# Altium PCB middlePCB_rev4.PcbDoc
Units mm, origin at the board's own origin, x right, y up, seen from the top; angles counter-clockwise.
Board outline 100.07 x 100 mm, 2 copper layers (Top Layer, Bottom Layer); 66 components, 66 nets, 280 pads, 196 vias.
Unrouted connection lines stored in the file: 215.
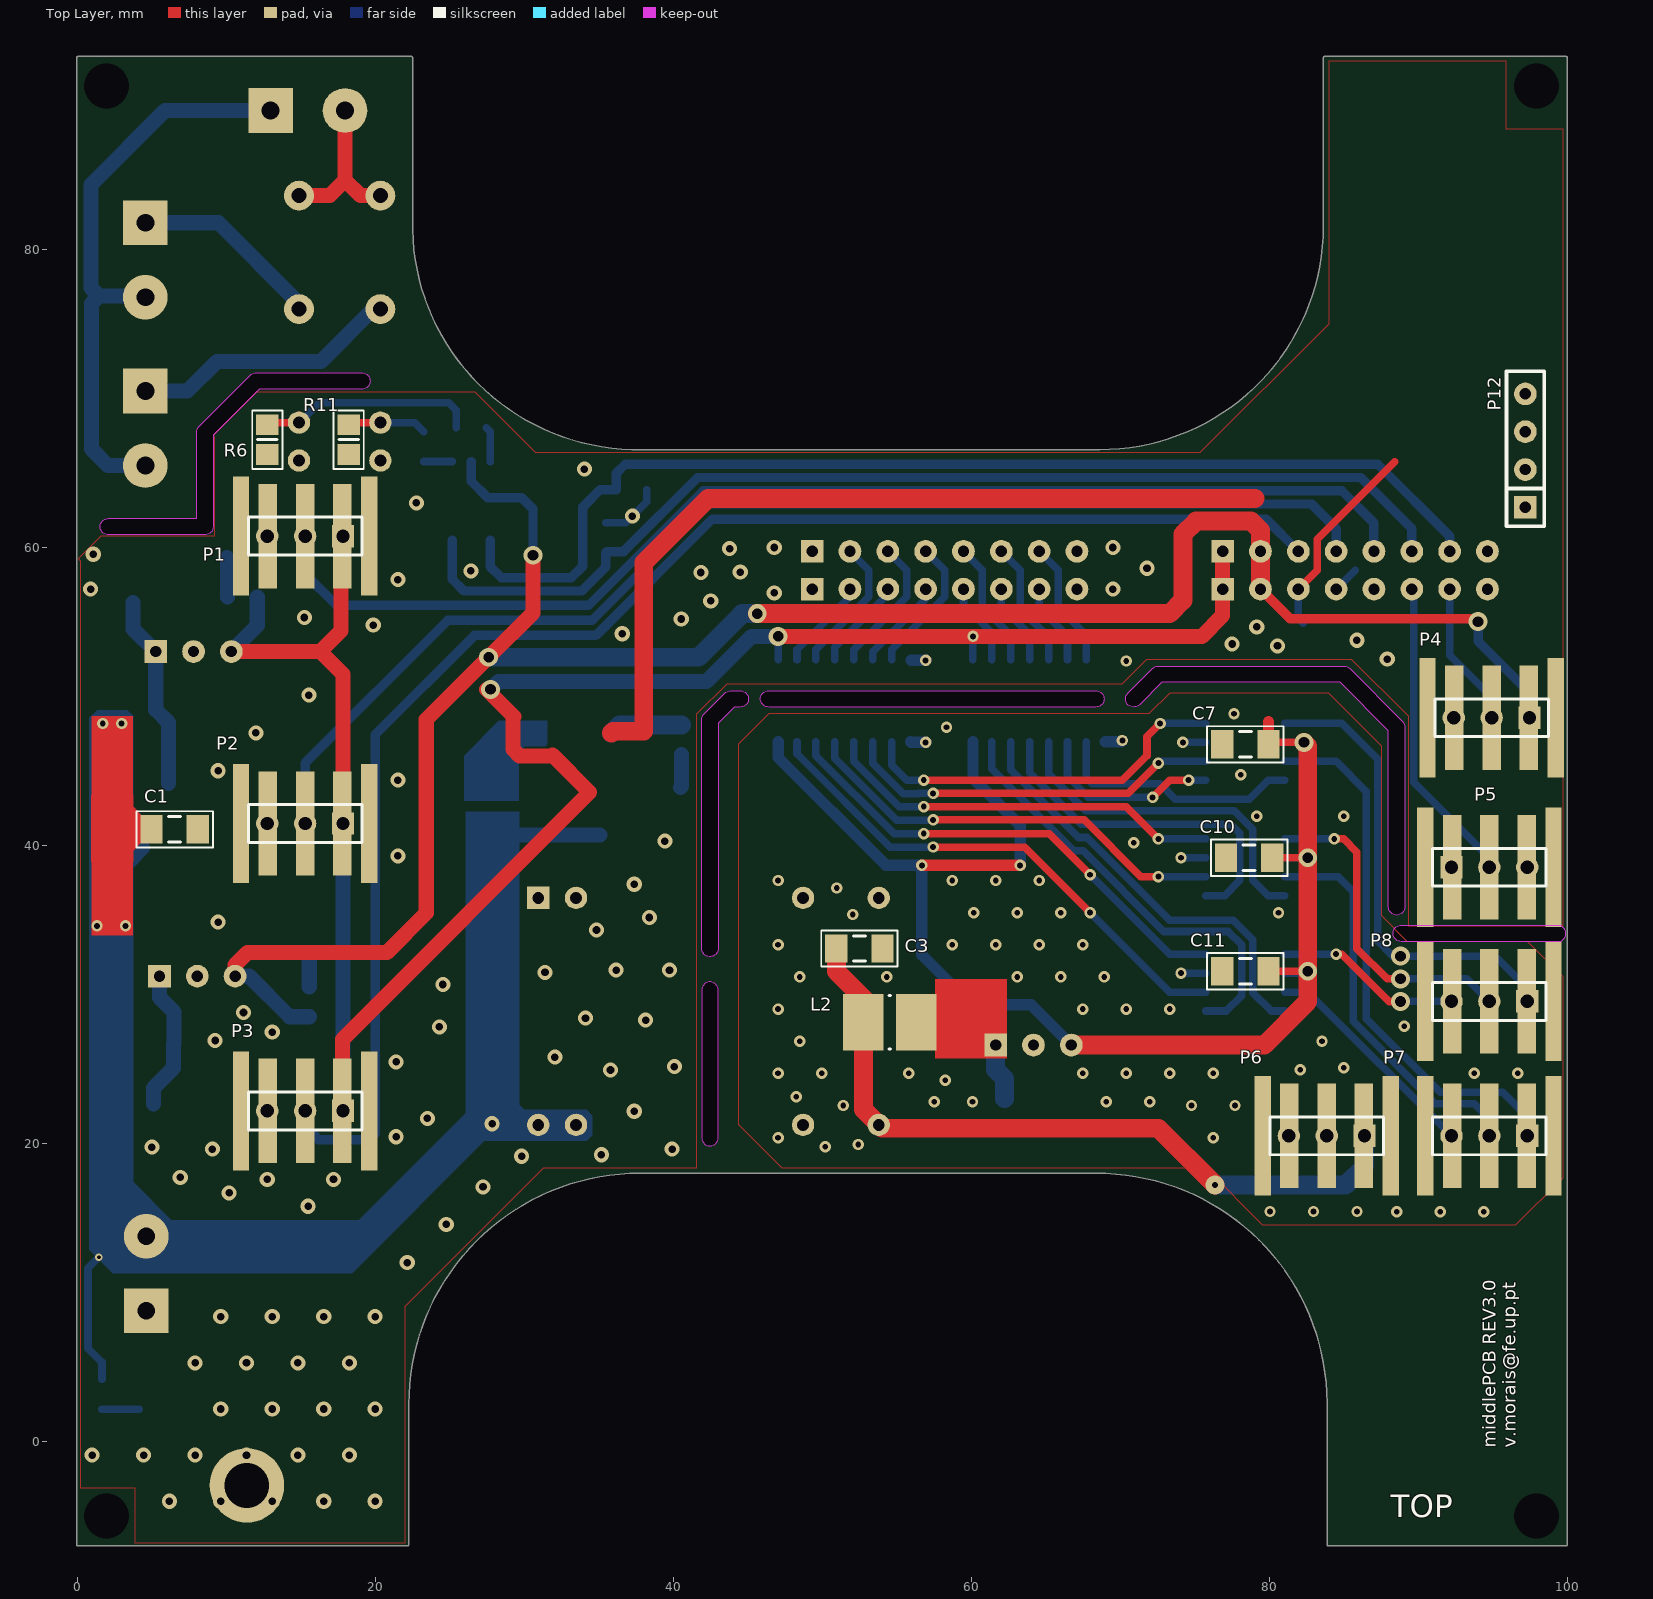
[diagram p0: Top Layer view]
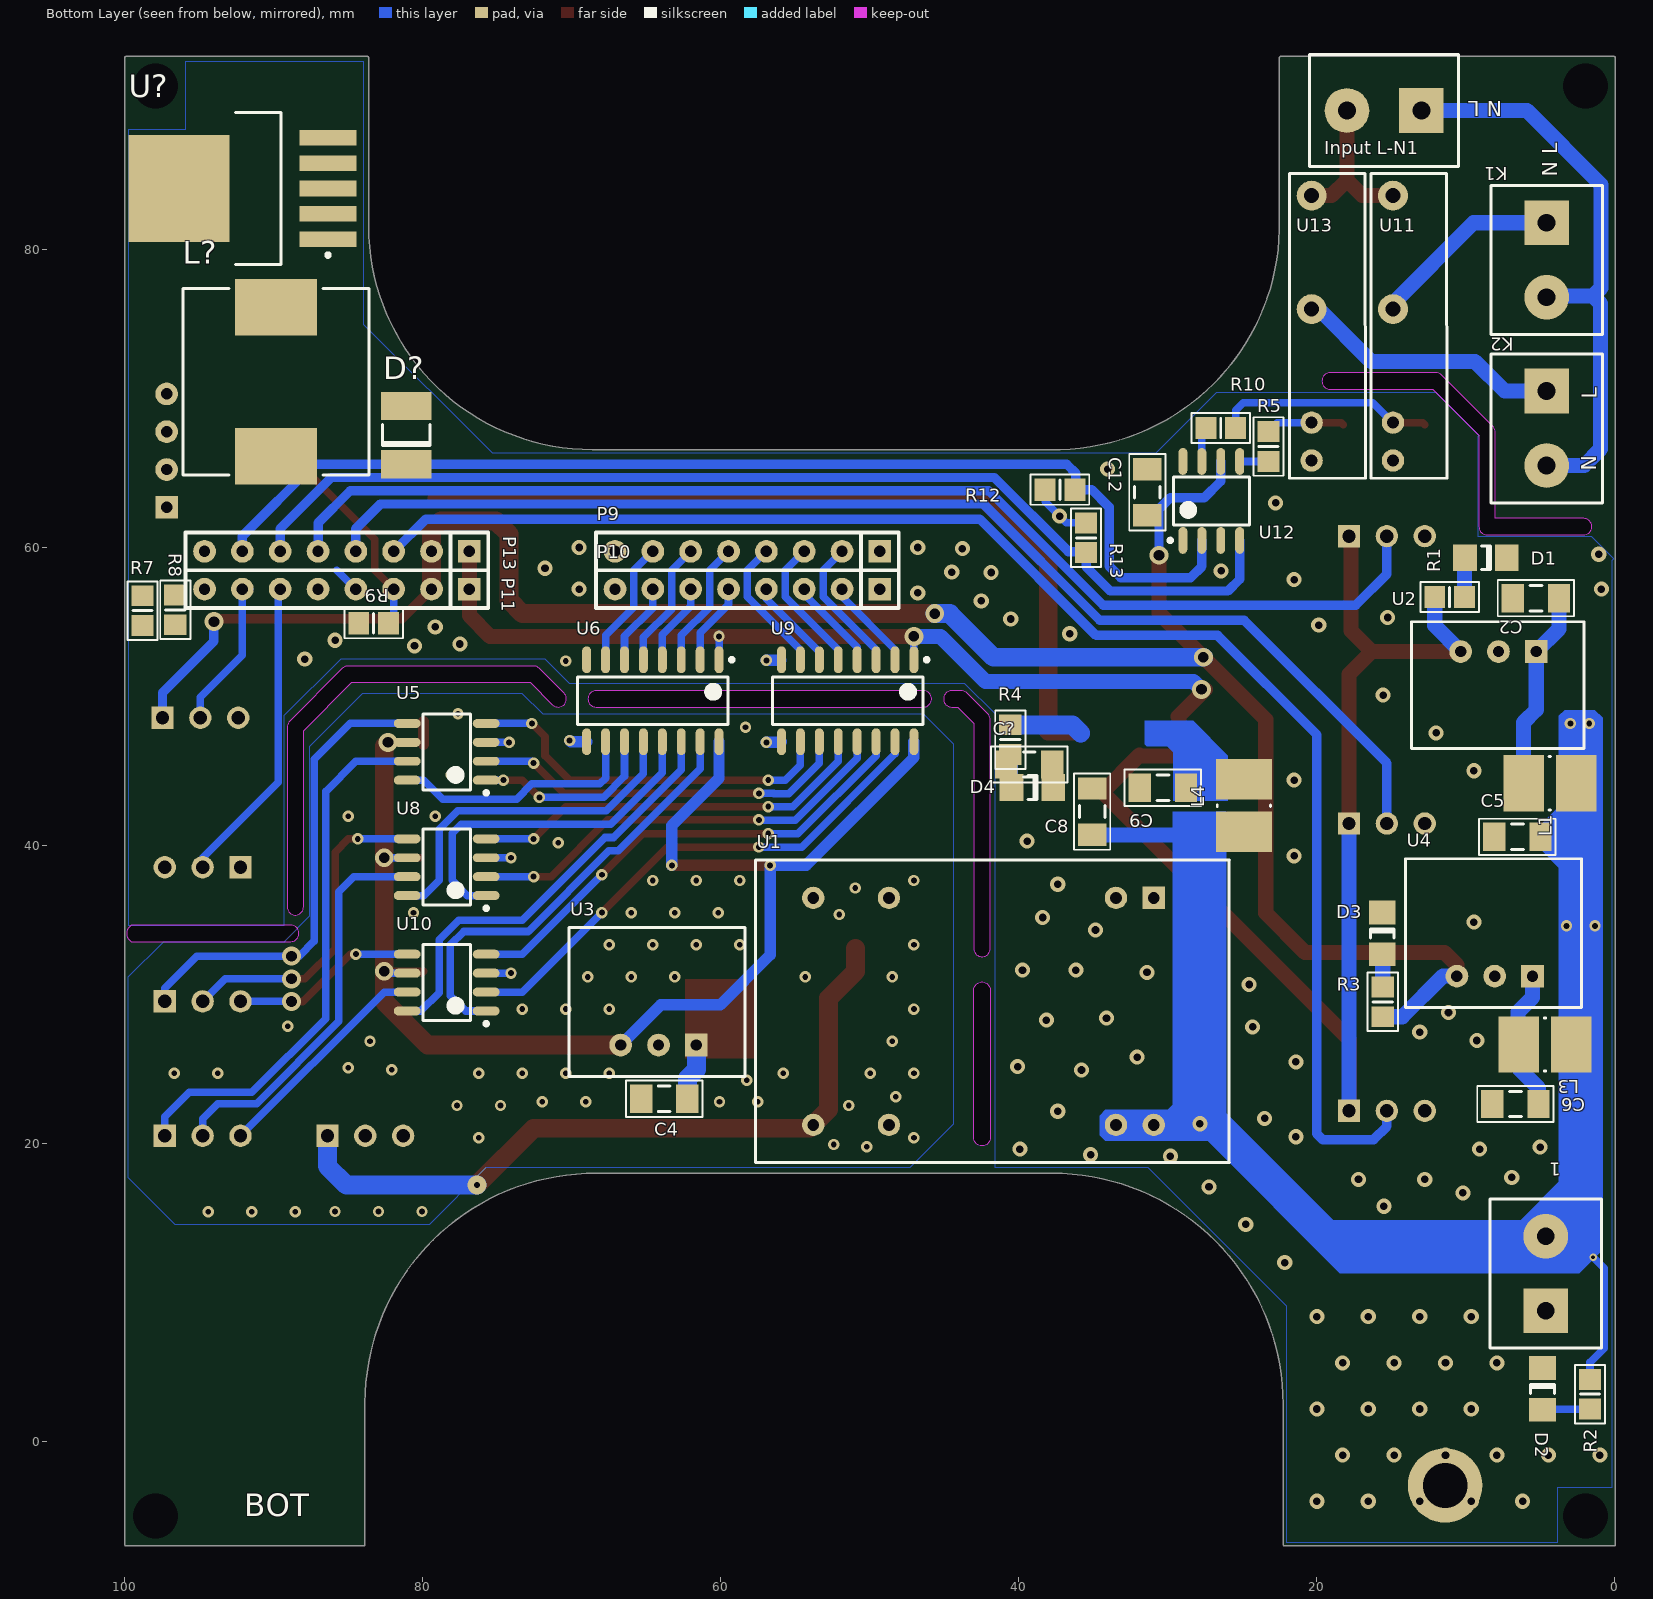
[diagram p1: Bottom Layer view, seen from below]
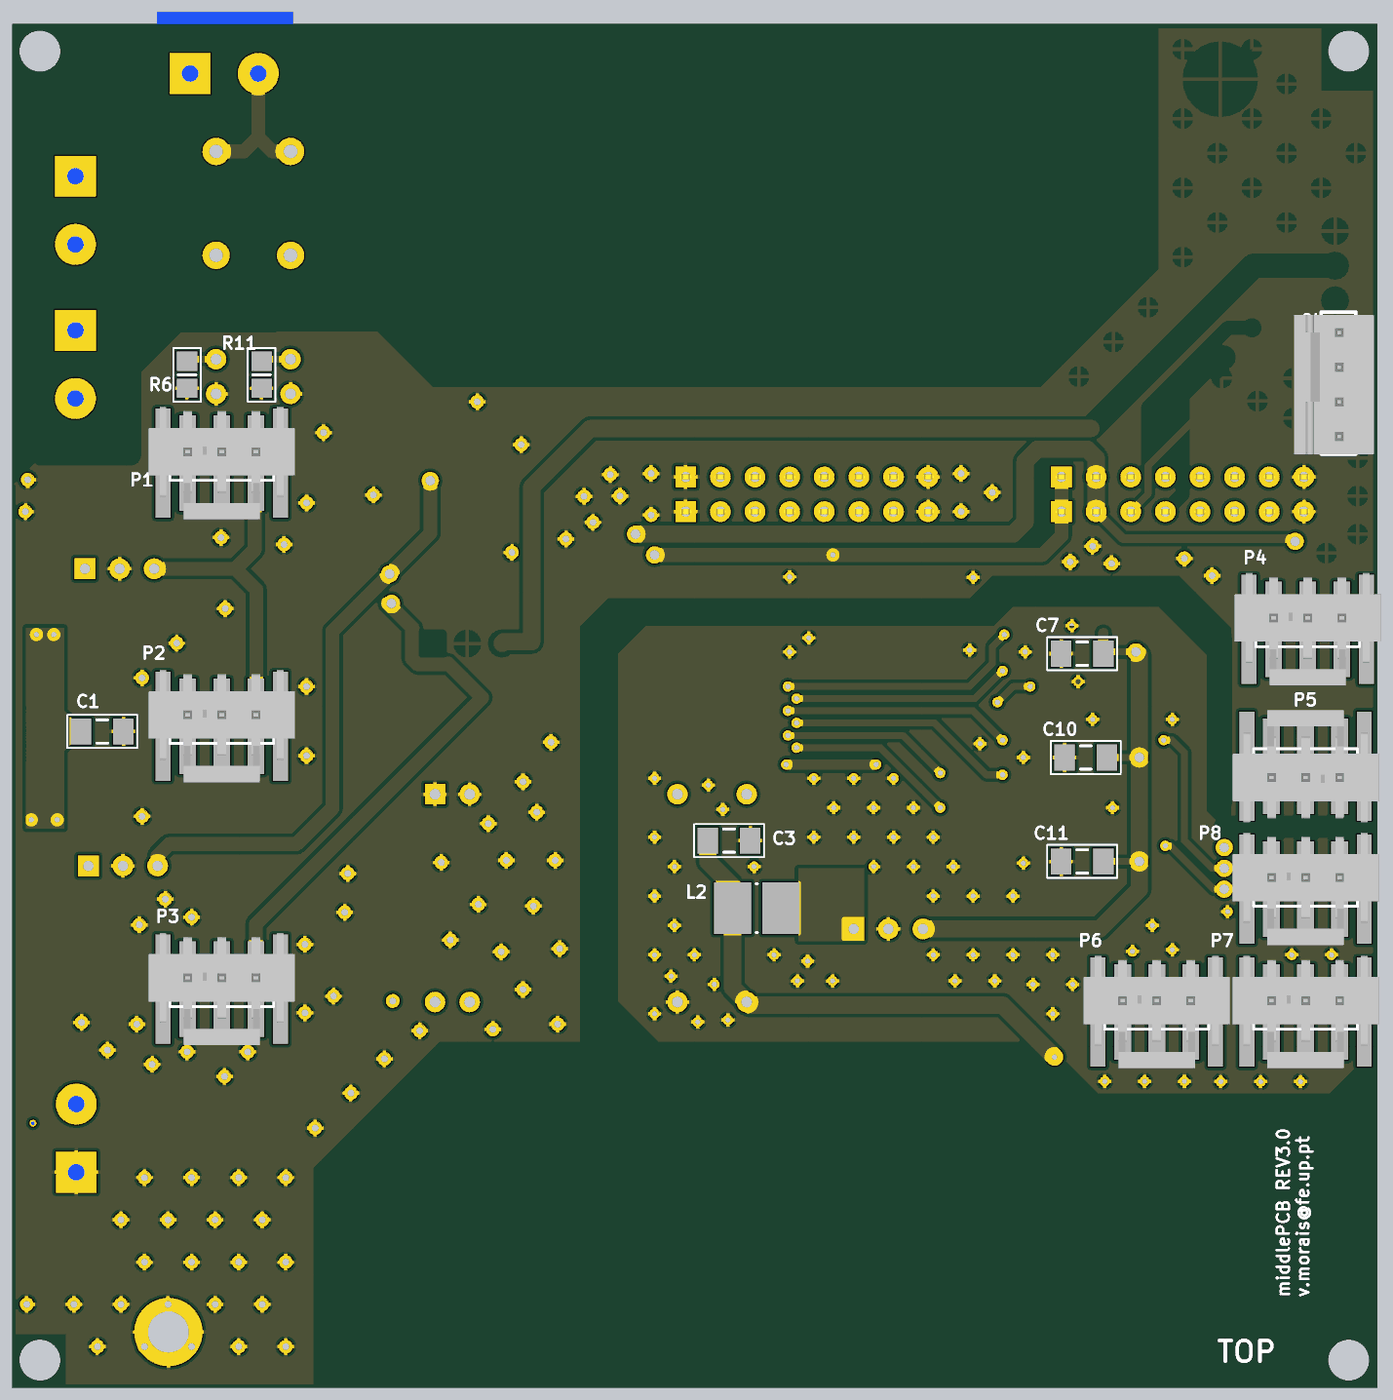
[diagram p2: 3D render of the assembled board from above, using the file's embedded part models]

## Layer stack, top to bottom
Top Solder: solder mask 0.0102, Solder Resist, Dk 3.5
Top Layer: signal copper 0.0356
Dielectric 1: dielectric 0.32, FR-4, Dk 4.8
Bottom Layer: signal copper 0.0356
Bottom Solder: solder mask 0.0102, Solder Resist, Dk 3.5

## Board outline
0.025,-7.009 22.123,-7.009 ccw(c22.123,-6.909) 22.224,-6.909 22.224,2.489 cw(c37.744,2.489) 37.744,18.01 68.351,18.01 ccw(c68.351,18.11) 68.352,18.01 cw(c68.415,2.553) 83.872,2.616 83.872,-6.909 ccw(c83.972,-6.909) 83.972,-7.009 99.898,-7.009 ccw(c99.898,-6.909) 99.999,-6.909 99.999,92.888 ccw(c99.898,92.888) 99.898,92.988 83.718,92.988 ccw(c83.718,92.888) 83.618,92.888 83.618,81.547 cw(c68.637,81.578) 68.606,66.598 ccw(c68.605,66.497) 68.605,66.598 37.871,66.598 ccw(c37.871,66.497) 37.869,66.598 cw(c37.554,81.674) 22.478,81.357 cw(c37.554,81.674) 22.478,81.358 22.478,81.356 22.478,92.888 ccw(c22.377,92.888) 22.377,92.988 0.025,92.988 ccw(c0.025,92.888) -0.074,92.875 ccw(c0.025,92.862) -0.075,92.862 -0.075,-6.909 ccw(c0.025,-6.909)
cut-out: 71.281,49.471 cw(c70.891,49.86) 70.502,50.249 72.153,51.9 cw(c72.542,51.513) 72.542,52.062 84.988,52.062 cw(c84.988,51.511) 85.379,51.899 88.934,48.344 cw(c88.546,47.956) 89.095,47.955 89.095,35.89 cw(c88.544,35.89) 87.994,35.89 87.994,47.727 84.76,50.961 72.77,50.961
cut-out: 46.38,49.31 cw(c46.38,49.86) 46.38,50.411 68.351,50.411 cw(c68.351,49.86) 68.902,49.86 cw(c68.351,49.86) 68.351,49.31
cut-out: 41.893,20.396 ccw(c42.443,20.396) 42.994,20.396 42.994,30.302 ccw(c42.443,30.302) 41.893,30.302
cut-out: 88.856,33.562 cw(c88.856,34.112) 88.856,34.663 99.543,34.663 cw(c99.248,34.112) 99.543,33.562
cut-out: 2.057,60.867 cw(c2.057,61.417) 2.057,61.968 7.984,61.968 7.984,67.767 cw(c8.534,67.767) 8.146,68.157 11.574,71.585 cw(c11.963,71.198) 11.963,71.747 19.075,71.747 cw(c19.075,71.196) 19.626,71.196 cw(c19.075,71.196) 19.075,70.646 12.191,70.646 9.085,67.539 9.085,61.417 cw(c8.534,61.417) 8.534,60.867
cut-out: 41.893,33.096 41.893,48.463 cw(c42.443,48.463) 42.055,48.853 42.054,48.852 43.451,50.249 43.45,50.248 cw(c43.84,49.86) 43.84,50.411 44.475,50.411 cw(c44.475,49.86) 45.026,49.86 cw(c44.475,49.86) 44.475,49.31 44.068,49.31 42.994,48.235 42.994,33.096 cw(c42.443,33.096)

## Design rules (kind name [scope] priority, off if disabled: settings)
Clearance [All] p1: gap=0.254 ignorepadtopadclearanceinfootprint=FALSE
Height [All] p1: minheight=0 maxheight=254 prefheight=12.7
HoleSize [All] p1: absolutevalues=TRUE maxlimit=25.4 minlimit=0.2 maxpercent=80.000 minpercent=20.000
PlaneClearance [All] p1: clearance=2.54
PolygonConnect [All] p1: connectstyle=Relief reliefconductorwidth=0.254 reliefentries=4 polygonreliefangle="90 Angle" airgapwidth=0.254
RoutingVias [All] p1: holewidth=0.711 width=1.27 viastyle="Through Hole" minholewidth=0.711 minwidth=1.27 maxholewidth=0.711 maxwidth=1.27
SilkToSilkClearance [All] p1: silktosilkclearance=0.025
SilkToSolderMaskClearance [IsPad] p1: minsilkscreentomaskgap=0.025 clearancetoexposedcopper=TRUE
SolderMaskExpansion [All] p1: expansion=0.102
Width [All] p1: maxlimit=3.81 minlimit=0.127 preferedwidth=0.508
25 further rules are at their usual default settings.

## Components (designator, comment, footprint, x,y, rotation, side; value= is the part's Value field where it differs from the comment)
1 "P 2p 5mm" connector1x2_parafuso 4.597,11.278 r90 bottom
C1 "C 10uF 1206 MLCC 50V X5R" CAPC_1206 6.502,41.097 r180 top
C2 "C 10uF 1206 MLCC 50V X5R" CAPC_1206 5.258,56.617 r180 bottom
C3 "C 10uF 1206 MLCC 50V X5R" CAPC_1206 52.476,33.096 r180 top
C4 "C 10uF 1206 MLCC 50V X5R" CAPC_1206 63.779,23.012 r180 bottom
C5 "C 10uF 1206 MLCC 50V X5R" CAPC_1206 6.502,40.597 r180 bottom
C6 "C 10uF 1206 MLCC 50V X5R" CAPC_1206 6.629,22.657 r180 bottom
C7 "C 10uF 1206 MLCC 50V X5R" CAPC_1206 78.384,46.804 r0 top
C8 "C 10uF 1206 MLCC 50V X5R" CAPC_1206 35.052,42.291 r270 bottom
C9 "C 10uF 1206 MLCC 50V X5R" CAPC_1206 30.302,43.891 r180 bottom
C10 "C 10uF 1206 MLCC 50V X5R" CAPC_1206 78.638,39.192 r0 top
C11 "C 10uF 1206 MLCC 50V X5R" CAPC_1206 78.384,31.572 r0 top
C12 "C 10uF 1206 MLCC 50V X5R" CAPC_1206 31.344,63.729 r270 bottom
C? "C 10uF 1206 MLCC 50V X5R" CAPC_1206 39.274,45.449 r180 bottom
D1 "IC LED 1206" DIODE_1206 8.614,59.334 r180 bottom
D2 "IC LED 1206" DIODE_1206 4.826,3.531 r90 bottom
D3 "IC LED 1206" DIODE_1206 15.57,34.112 r90 bottom
D4 "IC LED 1206" DIODE_1206 39.065,43.917 r180 bottom
D? "Diode" DIODE_1812 81.102,67.564 r270 bottom
"Input L-N1" "P 2p 5mm" connector1x2_parafuso 15.446,89.357 r0 bottom
K1 "P 2p 5mm" connector1x2_parafuso 4.538,79.324 r270 bottom
K2 "P 2p 5mm" connector1x2_parafuso 4.538,68.021 r270 bottom
L1 "IND RLS-126" "Inductor - RLS-126" 4.318,44.196 r0 bottom
L2 "IND RLS-126" "Inductor - RLS-126" 54.508,28.143 r0 top
L3 "IND RLS-126" "Inductor - RLS-126" 4.648,26.645 r0 bottom
L4 "IND RLS-126" "Inductor - RLS-126" 24.867,42.697 r90 bottom
L? "IND 100uH 1.7A" IND_SWRB1207 89.84,71.145 r270 bottom
P1 "P 8p 2.54 SR DW 3P" MOLEX_3p_105431_1103 15.265,60.782 r180 top locked
P2 "P 8p 2.54 SR DW 3P" MOLEX_3p_105431_1103 15.265,41.491 r180 top locked
P3 "P 8p 2.54 SR DW 3P" MOLEX_3p_105431_1103 15.265,22.2 r180 top locked
P4 "P 8p 2.54 SR DW 3P" MOLEX_3p_105431_1103 94.92,48.59 r180 top locked
P5 "P 8p 2.54 SR DW 3P" MOLEX_3p_105431_1103 94.767,38.557 r0 top locked
P6 "P 8p 2.54 SR DW 3P" MOLEX_3p_105431_1103 83.845,20.523 r180 top locked
P7 "P 8p 2.54 SR DW 3P" MOLEX_3p_105431_1103 94.767,20.523 r180 top locked
P8 "P 8p 2.54 SR DW 3P" MOLEX_3p_105431_1103 94.767,29.551 r180 top locked
P9 "P 8p 2.54 SR DW 8P" "Header 8x1 8.5mm" 49.301,59.766 r0 bottom
P10 "P 8p 2.54 SR DW 8P" "Header 8x1 8.5mm" 49.301,57.226 r0 bottom
P11 "P 8p 2.54 SR DW 8P" "Header 8x1 8.5mm" 76.86,57.226 r0 bottom
P12 "P 4p 2.54 MOL FAN" "HEADER 4p molex" 97.18,62.713 r90 top
P13 "P 8p 2.54 SR DW 8P" "Header 8x1 8.5mm" 76.86,59.766 r0 bottom
R1 "R 150 1/8W 0805 1%" RESC_0805 11.049,56.693 r0 bottom
R2 "R 2k7 1/8 0805 1%" RESC_0805 1.626,3.175 r90 bottom
R3 "R 330 1/8 0805 1%" RESC_0805 15.545,29.515 r270 bottom
R4 "R 1k2 1/8 0805 1%" RESC_0805 40.538,47.117 r90 bottom
R5 "R 10 1/8W 0805 1%" RESC_0805 23.216,66.802 r90 bottom
R6 "R 0 1/8W 0805" RESC_0805 12.725,67.259 r270 top
R7 "R 0 1/8W 0805" RESC_0805 98.806,55.778 r270 bottom
R8 "R 0 1/8W 0805" RESC_0805 96.596,55.829 r270 bottom
R9 "R 0 1/8W 0805" RESC_0805 83.287,54.94 r180 bottom
R10 "R 10 1/8W 0805 1%" RESC_0805 26.416,68.047 r180 bottom
R11 "R 0 1/8W 0805" RESC_0805 18.186,67.259 r270 top
R12 "R 0 1/8W 0805" RESC_0805 37.211,63.908 r180 bottom
R13 "R 0 1/8W 0805" RESC_0805 35.458,60.673 r270 bottom
U1 "IC DC/DC 15V ISO" "MeanWell SCWNo6" 30.912,21.26 r270 bottom
U2 "IC DC/DC 3V3" "DC/DC - R-78E3.3" 2.022,55.035 r0 bottom
U3 "IC DC/DC 5V" "DC/DC - OKI-78SR-E" 70.16,24.519 r180 bottom
U4 "IC DC/DC 5V" "DC/DC - OKI-78SR-E" 14.022,29.142 r180 bottom
U5 "IC Driver 5A Dual ENA IX4340" SOIC-MIC4126 78.384,46.304 r0 bottom
U6 "IC ISO SI8660" SOIC127P610X155-16N 64.541,49.733 r270 bottom
U8 "IC Driver 5A Dual ENA IX4340" SOIC-MIC4126 78.384,38.557 r0 bottom
U9 "IC ISO SI8660" SOIC127P610X155-16N 51.46,49.733 r270 bottom
U10 "IC Driver 5A Dual ENA IX4340" SOIC-MIC4126 78.384,30.81 r0 bottom
U11 "IC Relay 5A 5V 5x20mm" "Relay - G6DN" 14.854,68.402 r90 bottom
U12 "IC DUAL MOS DRIVER MIC4127" SOIC-MIC4126 27.051,63.144 r90 bottom
U13 "IC Relay 5A 5V 5x20mm" "Relay - G6DN" 20.315,68.402 r90 bottom
U? "IC DC/C 12V" XL2576 92.1,84.125 r0 bottom

## Footprints (in the part's own frame and the unit in brackets; to place one, negate y for a bottom-side part, rotate by r counter-clockwise, add the part's x,y. Pads: shape width x height; smd on the part's side, far side on the other; paste and mask are expansions set on the pad)
CAPC_1206 [mm] "Chip Capacitor, Body 3.2x1.6mm, IPC Low Density"
  rect 1.5x1.9 smd: 1(-1.55,0) 2(1.55,0)
  silkscreen extent -2.57,-1.21 2.57,1.21, body extent -1.7,-0.9 1.7,0.9, height 1.35
connector1x2_parafuso [mm] "Connector; Header; 2 Position"
  rect 3x3 hole 1.2: 1(-2.5,0)
  round 3 hole 1.2: 2(2.5,0)
  silkscreen extent -5,-3.75 5,3.75, body extent -4.92,-4.53 5.68,4.47, height 14.6
"DC/DC - OKI-78SR-E" [mil]
  rect 60x60 hole 30: 1(336.22,82.68)
  round 60 hole 30: 2(236.22,82.68) 3(136.22,82.68)
  silkscreen extent 0,0 465,393, body extent 8,8 456,385, height 693
"DC/DC - R-78E3.3" [mil]
  rect 60x60 hole 30: 1(126.38,78.74)
  round 60 hole 30: 2(226.38,78.74) 3(326.38,78.74)
  silkscreen extent 0,0 457,335, body extent 8,8 447,325, height 402
DIODE_1206 [mm] "Chip Diode; Body 3.2 x 1.6 mm (LxW typ)"
  rect 1.6x1.8 smd: 1(-1.4,0) 2(1.4,0)
  silkscreen extent -0.3,-0.8 0.3,0.8
DIODE_1812 [mm] "Chip Diode; Body 4.5 x 3.2 mm (LxW typ)"
  rect 1.9x3.4 smd: 1(-1.95,0) 2(1.95,0)
  silkscreen extent -0.7,-1.6 0.7,1.6
"HEADER 4p molex" [mil] "header 4p"
  rect 60x60 hole 30: 1(0,0)
  round 60 hole 30: 2(100,0) 3(200,0) 4(300,0)
  silkscreen extent -50,-50 360,50, body extent -50,-102 352,128, height 407
"Header 8x1 8.5mm" [mil] "Stackable 8 pin header"
  rect 60x60 hole 30: 1(0,0)
  round 60 hole 30: 2(100,0) 3(200,0) 4(300,0) 5(400,0) 6(500,0) 7(600,0) 8(700,0)
  silkscreen extent -50,-50 750,50, body extent -50,-50 750,50, height 335
IND_SWRB1207 [mm] "Precision Wire Wound Inductor, 2-Leads, Body 12,50x12,50mm, IPC Medium Density"
  rect 3.8x5.5 smd: 1(-5,0) 2(5,0)
  silkscreen extent -6.25,-6.25 6.25,6.25, body extent -6.25,-6.25 6.25,6.25, height 8
"Inductor - RLS-126" [mm]
  rect 2.72x3.77 smd: 1(-1.77,0) 2(1.77,0)
  silkscreen extent -0.05,-1.79 0.05,1.79, body extent -2.55,-1.8 2.55,1.8, height 2.6
"MeanWell SCWNo6" [mm]
  rect 1.5x1.5 hole 0.8: 2(-15.24,0)
  round 1.5 hole 0.8: 3(-15.24,-2.54) 9(-15.24,-17.78) 11(-15.24,-22.86) 14(0,-22.86) 16(0,-17.78) 22(0,-2.54) 23(0,0)
  silkscreen extent -17.78,-26.75 2.54,5.08, body extent -17.65,-26.64 2.44,4.95, height 10.2
MOLEX_3p_105431_1103 [mm] "conector 3p 2.5mm"
  rect 1.1x8 smd: 0(-4.305,0) 0(4.305,0)
  rect 1.5x1.5 hole 0.9: 1(-2.54,0)
  rect 1.24x7 smd: 1(-2.5,0) 2(0,0) 3(2.5,0)
  round 1.5 hole 0.9: 2(0,0) 3(2.54,0)
  silkscreen extent -3.81,-1.27 3.81,1.27, body extent -5.36,-4.14 5.36,4.11, height 11.3
"Relay - G6DN" [mm]
  round 1.5 hole 0.8: 1(-2.54,0)
  round 1.5 hole 0.8 paste+0: 2(0,0)
  round 2 hole 1: 3(7.62,0) 4(15.24,0)
  silkscreen extent -3.73,-3.62 16.74,1.49, body extent -3.33,-3.53 16.51,1.42, height 13
RESC_0805 [mm] "Chip Resistor, Body 2.0x1.3mm, IPC Low Density"
  rect 1.4x1.5 smd: 1(-1,0) 2(1,0)
  silkscreen extent -1.96,-1.01 1.96,1.01, body extent -1.07,-0.7 1.08,0.7, height 0.65
SOIC127P610X155-16N [mm] "SOIC, 16-Leads, Body 10,05x3,95mm, Pitch 1,27mm, IPC Medium Density"
  oval 1.8x0.6 smd: 1(-2.75,4.445) 2(-2.75,3.175) 3(-2.75,1.905) 4(-2.75,0.635) 5(-2.75,-0.635) 6(-2.75,-1.905) 7(-2.75,-3.175) 8(-2.75,-4.445) 9(2.75,-4.445) 10(2.75,-3.175) 11(2.75,-1.905) 12(2.75,-0.635) 13(2.75,0.635) 14(2.75,1.905) 15(2.75,3.175) 16(2.75,4.445)
  silkscreen extent -2.87,-5.05 1.6,5.42, body extent -3.08,-5.05 3.08,5.05, height 1.55
SOIC-MIC4126 [mm] "SOIC, 8-Leads, Body 5,08x3,95mm, Pitch 1,27mm, IPC Medium Density"
  oval 1.8x0.6 smd: 1(-2.65,1.905) 2(-2.65,0.635) 3(-2.65,-0.635) 4(-2.65,-1.905) 5(2.65,-1.905) 6(2.65,-0.635) 7(2.65,0.635) 8(2.65,1.905)
  silkscreen extent -2.77,-2.55 1.6,2.88, body extent -2.83,-2.55 2.83,2.55, height 1.55
XL2576 [mm] "D2-PAK, 6-Pads, Body 7,45x8,44mm (max), IPC Medium Density"
  rect 3.8x1.05 smd: 1(-5.75,3.4) 2(-5.75,1.7) 3(-5.75,0) 4(-5.75,-1.7) 5(-5.75,-3.4)
  rect 6.8x7.2 smd: 6(4.25,0)
  silkscreen extent -5.87,-5.1 0.45,5.1, body extent -6.61,-5.08 7.74,5.07, height 5.72

## Part data
1 "Input L-N1" K1 K2: library part gen_purpose_conn_1x2, "Bloques de terminales de PCB de perfil estándar RS de 5,0 mm", Price=0,24, RS VPN=896-6696
C1 C2 C3 C4 C5 C6 C7 C8 C9 C10 C11 C12 C?: library part "Capacitor SMD", "Capacitores de cerâmica multicamada MLCC - SMD/SMT 1206 50V 10uF 20% X5R", LCSC PART #=C13585, Mouser VPN=963-UMK316BBJ106ML-T, Price=0,31
D1 D2 D3 D4: library part LED, "LEDs padrão - SMD GREEN WATER CLEAR", LCSC PART #=C88326, Mouser VPN=604-APT3216SGC, Price=0,387
D?: "Default Diode", LCSC PART #=C22452
L1 L2 L3 L4: library part Inductor, "Indutores fixos Line Inductors for RECOM Power Supply", Mouser VPN=919-RLS-126, Price=0,549
L?: library part Inductor, "Indutores fixos Line Inductors for RECOM Power Supply", LCSC PART #=C169378
P1 P2 P3 P4 P5 P6 P7 P8: library part "Header 3", "Distribuidores e Alojamento de Fios CGrid Hrd SRDW THo le 8ckt", Mouser VPN=538-87937-0800, Price=0,621
P9 P10 P11 P13: library part jumper_8p, "Distribuidores e Alojamento de Fios CGrid Hrd SRDW THo le 8ckt", Mouser VPN=538-87937-0800, Price=0,621
P12: library part "Header 4p molex", "Distribuidores e Alojamento de Fios 4 PIN HEADER WITH FR R WITH FRICTION LOCK", Mouser VPN=538-47053-3000, Price=0,405
R1: library part Resistor, "Resistores de Filme Espesso - SMD 1/8watt 150ohms 1% 100ppm", LCSC PART #=C17471, Mouser VPN=71-CRCW0805-150-E3, Price=0,09
R2: library part Resistor, "Resistores de Filme Espesso - SMD 1/8watt 2.7Kohms 1% 100ppm", LCSC PART #=C17530, Mouser VPN=71-CRCW0805-2.7K-E3, Price=0,09
R3: library part Resistor, "Resistores de Filme Espesso - SMD 1/8Watt 330ohms 1% Commercial Use", LCSC PART #=C17630, Mouser VPN=71-CRCW0805330RFKEAC, Price=0,09
R4: library part Resistor, "Resistores de Filme Espesso - SMD 1/8watt 1.2Kohms 1%", LCSC PART #=C17379, Mouser VPN=71-CRCW08051K20FKEA, Price=0,09
R5 R10: library part Resistor, "Resistores de Filme Espesso - SMD 1/8Watt 10ohms 1% Commercial Use", LCSC PART #=C17415, Mouser VPN=71-CRCW080510R0FKEAC, Price=0,09
R6 R7 R8 R9 R11 R12 R13: library part Resistor, "Resistores de Filme Espesso - SMD 1/8Watt 0ohms Commercial Use", LCSC PART #=C17477, Mouser VPN=71-CRCW08050000Z0EAC, Price=0,09
U1: library part "MEANWELL - SCWN06", "Conversores CC/CC com isolação 6W 18-36Vin 15Vout 400mA DIP24 Iso", Mouser VPN=709-SCWN06B-15, Price=8,26
U2: library part "DC/DC - R-78E3.3", "Conversores CC/CC sem isolação 3.3V 500MA OUT THRU", Mouser VPN=919-R-78E3.3-0.5, Price=2,43
U3 U4: library part "DC/DC - R-78E3.3", "Conversores CC/CC sem isolação 7-36Vin 5Vout 1.5A VSIP Encapsulated", Mouser VPN=580-OK78SR5/1.5W36EC, Price=5,31
U5 U8 U10: library part "Driver - IX4340", "Drivers de portas Dual 5A Gate Driver IC", LCSC PART #=C138519, Equivalente=UCC27424DR, Mouser VPN=747-IX4340NETR, Price=0,891
U6 U9: library part "ISO SI8660", "Isoladores digitais 1 kV 6-channel digital isolator", Mouser VPN=634-SI8660BA-B-IS1, Price=1,82
U11 U13: library part "Relay - G6DN", "Relés para uso geral 1 form A w/ 5VDC Coil-standard type", Mouser VPN=653-G6DN-1A-LDC5, Price=1,59
U12: library part MOS_DRIVER-MIC4126, "Drivers de portas 1.5A Dual High Speed MOSFET Driver with Low Thermal Impedance", LCSC PART #=C20551, Equivalente=TC4427AEOA, Mouser VPN=998-MIC4126YME, Price=0,756
U?: library part XL2576, LCSC PART #=C73351

## Free pads (board coordinates)
  round 1.524 hole 3 unplated: 4(1.93,-5.004) 4(1.93,90.996) 4(97.93,-5.004) 4(97.93,90.996)
  round 5 hole 3: 5(11.354,-2.946)

## Via types
v1: diameter 1.016, hole 0.508, Top Layer to Bottom Layer, 89 vias
v2: diameter 0.762, hole 0.381, Top Layer to Bottom Layer, 64 vias
v3: diameter 0.762, hole 0.4, Top Layer to Bottom Layer, 29 vias
v4: diameter 1.27, hole 0.711, Top Layer to Bottom Layer, 12 vias
v5: diameter 1.27, hole 0.4, Top Layer to Bottom Layer, 1 vias
v6: diameter 0.508, hole 0.254, Top Layer to Bottom Layer, 1 vias

## Nets (pads, with @x,y where several pads share a name; then routed paths per layer and width w, separated by ;. In a path a pad name is that pad's centre, name@x,y a point inside that pad or via, vN(x,y) a via of type N, cw(c..) or ccw(c..) an arc to the next point about the centre after c; other vN are vias at no path point)
3V3: P1.1 P2.1 P3.1 P11.1 P13.1 R1.2 U2.3 U6.1 U9.1 | length 148.8
  Top Layer w1.016: U2.3 16.281,53.035 ; P3.1@17.765,22.2 17.765,26.986 34.366,43.586 31.87,46.083 31.812,46.025 29.656,46.025 29.21,46.471 29.21,48.626 29.268,48.685 27.457,50.495 v4(27.711,50.495) ; P2.1@17.805,41.491 17.805,51.511 16.281,53.035 ; P1.1@17.805,60.782 17.678,60.655 17.678,54.432 16.281,53.035 ; v4(47.015,54.051) v3(60.096,54.051) 75.463,54.051 76.86,55.448 P11.1 P13.1
  Bottom Layer w0.508: U9.1 v4(47.015,54.051) v4@47.015,54.178 ; U6.1 v3(60.096,54.051) v3@60.096,54.178
  Bottom Layer w1.016: U2.3 12.049,54.772 R1.2 ; P3.1@17.805,22.2 P2.1@17.805,41.491 ; v4(27.711,50.495) 28.245,51.029 42.215,51.029 45.237,54.051 v4(47.015,54.051)
3V3GND: 1.1 C1.1 C2.1 C5.1 C6.1 C8.1 C9.1 C12.1 C?.1 D1.2 D2.2 D3.2 D4.2 D?.1 P1.3 P2.3 P3.3 P4.3 P5.3 P9.1 P9.8 P10.1 P10.8 P11.8 P12.4 P13.8 pad.5 R6.2 R9.1 R11.2 R12.1 R13.1 U1.2 U1.3 U2.2 U4.2 U6.8 U9.8 U11.1 U12.3 U13.1 U?.3 U?.5 U?.6 | length 5.1
  Bottom Layer w0.508: R13.1 36.779,61.673 v1(37.236,62.13) 38.211,63.104 R12.1
  Bottom Layer w0.762: U9.8@55.949,52.439 v3(56.921,52.439)
  other v1: 6.147,-4.013 9.601,-4.013 13.056,-4.013 16.51,-4.013 19.964,-4.013 0.965,-0.914 4.42,-0.914 7.874,-0.914 11.328,-0.914 14.783,-0.914 18.237,-0.914 9.601,2.184 13.056,2.184 16.51,2.184 19.964,2.184 7.874,5.283 11.328,5.283 14.783,5.283 18.237,5.283 9.601,8.382 13.056,8.382 16.51,8.382 19.964,8.382 22.123,12.014 24.74,14.58 15.469,15.799 10.16,16.688 27.203,17.094 12.725,17.602 17.17,17.602 6.883,17.729 29.794,19.152 35.154,19.253 9.042,19.634 39.903,19.634 4.978,19.761 21.37,20.465 23.47,21.692 37.363,22.174 35.763,24.943 40.056,25.171 21.37,25.49 32.029,25.806 9.22,26.924 13.056,27.483 24.282,27.838 38.125,28.296 34.087,28.423 11.125,28.804 24.511,30.683 31.369,31.496 36.144,31.648 39.726,31.648 34.823,34.341 9.423,34.874 38.379,35.179 37.363,37.414 21.488,39.319 39.421,40.31 21.488,44.399 9.423,45.034 11.963,47.574 15.519,50.114 87.909,52.527 80.543,53.416 77.495,53.543 85.877,53.797 36.551,54.229 79.146,54.686 19.837,54.813 40.513,55.22 15.215,55.321 42.494,56.439 46.761,56.972 0.864,57.226 69.494,57.226 21.488,57.861 41.834,58.344 44.475,58.369 26.391,58.445 71.78,58.623 1.041,59.563 43.764,59.944 46.761,60.02 69.494,60.02 22.733,63.017 34.011,65.278
  other v2: 70.383,52.4
5V: C12.2 P4.1 P11.2 P13.2 R3.2 U4.3 U12.6 | length 143.3
  Top Layer w0.635: P11.2 81.382,55.245 93.802,55.245 v4(94.005,55.042)
  Top Layer w1.016: U4.3 10.562,32 11.405,32.842 20.752,32.842 23.393,35.484 23.393,48.463 v4(27.584,52.654) 30.561,55.631 v4(30.561,59.499)
  Top Layer w1.27: v4(45.618,55.575) 73.304,55.575 74.193,56.464 74.193,60.909 75.082,61.798 78.765,61.798 79.4,61.163 P13.2 P11.2
  Bottom Layer w0.635: U12.6 26.416,64.465 27.534,63.348 29.82,63.348 30.561,62.606 v4(30.561,59.499) ; v4(94.005,55.042) 94.005,53.721 97.46,50.267 P4.1@97.46,48.59
  Bottom Layer w1.016: U4.3 11.506,31.242 14.233,28.515 R3.2
  Bottom Layer w1.27: v4(27.584,52.654) 41.681,52.654 44.602,55.575 v4(45.618,55.575)
12V: C?.2 L?.2 P12.3 R4.2 U?.4 | length 61.3
  Top Layer w1.27: 35.839,47.574 35.95,47.685 37.998,47.685 37.998,59.004 42.316,63.322 79.019,63.322
  Bottom Layer w1.27: 35.814,47.549 36.382,48.117 R4.2
24VDC: 1.2 C1.2 C5.2 C8.2 L1.1 L3.1 L4.1 R2.2 U1.22 U1.23 | length 16
  Bottom Layer w0.508: v6(1.422,12.37) 0.686,11.633 0.686,6.274 1.626,5.334 R2.2
  Bottom Layer w1.016: 27.982,40.716 C8.2@35.052,40.716
  other v1: 27.813,21.336
  other v3: 1.295,34.62 3.2,34.62 1.676,48.209 2.946,48.209
ena_uh: U5.8 U6.10 | length 16.9
  Bottom Layer w0.508: U6.10 67.716,44.526 68.097,44.145 72.669,44.145 73.685,43.129 78.638,43.129 79.908,44.399 U5.8
ena_ul: U5.1 U6.11 | length 12.8
  Top Layer w0.508: v3(72.161,43.247) 73.313,44.399 v3(74.574,44.399)
  Bottom Layer w0.508: U6.11 66.446,44.653 67.852,43.247 v3(72.161,43.247) ; v3@74.447,44.399 v3(74.574,44.399) U5.1
ena_vh: U6.12 U8.8 | length 23.4
  Bottom Layer w0.508: U6.12 65.176,44.846 67.673,42.349 77.646,42.349 78.892,41.103 78.892,37.668 79.908,36.652 U8.8
ena_vl: U6.13 U8.1 | length 23.7
  Bottom Layer w0.508: U6.13 63.906,44.907 67.362,41.451 77.395,41.451 78.003,40.843 78.003,37.668 76.987,36.652 U8.1
ena_wh: U6.14 U10.8 | length 29.1
  Bottom Layer w0.508: U6.14 62.636,45.1 67.183,40.553 67.752,40.553 73.304,35.001 77.567,35.001 78.892,33.676 78.892,30.124 80.111,28.905 U10.8
ena_wl: U6.15 U10.1 | length 29.7
  Bottom Layer w0.508: U6.15 61.366,45.161 66.873,39.655 67.508,39.655 72.923,34.239 77.251,34.239 78.13,33.36 78.13,29.921 77.114,28.905 U10.1
I_U: P1.2 P13.5 | length 81.1
  Bottom Layer w0.635: P1.2@15.265,60.782 15.265,58.242 17.361,56.147 34.303,56.147 41.986,63.83 84.861,63.83 87.02,61.671 P13.5
I_V: P2.2 P13.4 | length 82.7
  Bottom Layer w0.635: P2.2@15.265,41.491 15.265,45.542 24.854,55.131 34.544,55.131 42.355,62.941 82.829,62.941 84.48,61.29 P13.4
I_W: P3.2 P13.3 | length 101.9
  Bottom Layer w0.635: P3.2@15.265,22.2 15.265,21.158 16.154,20.269 19.583,20.269 19.964,20.65 19.964,47.447 26.632,54.115 34.785,54.115 42.596,61.925 79.781,61.925 P13.3
IN_UH: P8.1 U5.5 | length 31.7
  Bottom Layer w0.508: U5.5 84.861,48.209 87.274,45.796 87.274,33.604 88.29,32.588 v4(88.798,32.588) 95.148,32.588 97.307,30.429 P8.1@97.307,29.551
IN_UL: P7.1 U5.7 | length 36.4
  Bottom Layer w0.508: U5.7 84.48,45.669 86.512,43.637 86.512,28.393 91.462,23.444 95.656,23.444 97.307,21.793 P7.1@97.307,20.523
IN_VH: P8.2 U8.5 | length 22
  Top Layer w0.508: v3(84.353,40.462) 84.988,40.462 85.877,39.573 85.877,33.096 87.909,31.064 v4(88.798,31.064)
  Bottom Layer w0.508: U8.5 v3(84.353,40.462) ; v4(88.798,31.064) 93.254,31.064 P8.2@94.767,29.551
IN_VL: P7.2 U8.7 | length 26.7
  Bottom Layer w0.508: U8.7 84.607,37.922 85.623,36.906 85.623,28.205 91.146,22.682 93.751,22.682 94.767,21.666 P7.2@94.767,20.523
IN_WH: P8.3 U10.5 | length 12.7
  Top Layer w0.508: v3(84.48,32.715) 84.861,32.715 88.036,29.54 v4(88.798,29.54)
  Bottom Layer w0.508: U10.5 v3(84.48,32.715) ; v4(88.798,29.54) 88.692,29.54 88.682,29.551 P8.3@92.227,29.551
IN_WL: P7.3 U10.7 | length 15.2
  Bottom Layer w0.508: U10.7 82.575,30.175 P7.3@92.227,20.523
ISO_5gnd: C3.1 C4.1 C7.1 C10.1 C11.1 P6.2 P6.3 U1.16 U3.2 U5.3 U6.9 U8.3 U9.9 U10.3 | length 7.2
  Bottom Layer w0.508: v3@73.939,31.445 v3(74.066,31.445) U10.3 ; v3(74.066,39.192) U8.3 ; v3(74.193,46.939) U5.3
  Bottom Layer w0.762: U9.9 55.949,46.939 v3(56.921,46.939) ; U6.9 70.046,46.983 v3(70.129,47.066)
  other v2: 80.035,15.443 82.956,15.443 85.877,15.443 88.551,15.419 91.472,15.419 94.393,15.419 50.184,19.798 52.4,19.938 47.015,20.396 76.225,20.396 51.397,22.555 74.765,22.555 77.686,22.555 57.493,22.809 60.071,22.809 69.05,22.809 71.971,22.809 48.228,23.153 58.242,24.256 47.015,24.714 49.936,24.714 55.778,24.714 67.462,24.714 70.383,24.714 73.304,24.714 76.225,24.714 93.751,24.714 96.672,24.714 82.067,24.968 84.988,25.095 48.476,26.873 83.528,26.873 89.052,27.889 47.015,29.032 67.462,29.032 70.383,29.032 73.304,29.032 48.476,31.191 54.318,31.191 63.081,31.191 66.002,31.191 68.923,31.191 47.015,33.35 58.699,33.35 61.62,33.35 64.541,33.35 67.462,33.35 52.019,35.382 60.16,35.509 63.081,35.509 66.002,35.509 80.607,35.509 50.952,37.16 47.015,37.668 58.699,37.668 61.62,37.668 64.541,37.668 70.891,40.208 79.146,41.986 84.988,41.986 78.084,44.754 58.318,47.955 77.622,48.854
ISO_5V: C7.2 C10.2 C11.2 U3.3 U5.6 U6.16 U8.6 U9.16 U10.6 | length 96.6
  Top Layer w0.508: C11.2 80.061,31.445 80.188,31.572 v4(82.575,31.572) ; C7.2 80.069,46.939 v4(82.321,46.939) ; C10.2 v4(82.575,39.192)
  Top Layer w0.762: v3(56.667,38.684) v3(63.271,38.684) ; C7.2 79.934,48.31
  Top Layer w1.27: U3.3 79.654,26.619 82.575,29.54 v4(82.575,31.572) v4(82.575,39.192) 82.575,46.685 v4(82.321,46.939)
  Bottom Layer w0.508: U10.6 82.448,31.445 v4(82.575,31.572) ; U8.6 v4(82.575,39.192) ; U5.6 v4(82.321,46.939)
  Bottom Layer w0.762: U9.16 47.015,45.923 54.254,38.684 v3(56.667,38.684) 56.667,32.664 60.02,29.312 64.008,29.312 U3.3 ; U6.16 60.096,44.526 63.271,41.351 v3(63.271,38.684)
ISO_15V: C3.2 L2.1 P6.1 U1.14 | length 49.9
  Top Layer w1.27: C3.2 50.926,31.573 52.738,29.761 L2.1 52.738,22.293 54,21.031 72.542,21.031 v5(76.352,17.221)
  Bottom Layer w1.27: v5(76.352,17.221) 85.115,17.221 86.385,18.491 P6.1@86.385,20.523
iso_ENA_UH: P9.7 U6.7 | length 8.6
  Bottom Layer w0.508: P9.7 65.811,58.496 65.811,56.018 67.716,54.113 U6.7
iso_ENA_UL: P10.7 U6.6 | length 5.5
  Bottom Layer w0.508: P10.7 64.541,55.956 66.446,54.051 U6.6
iso_ENA_VH: P9.6 U6.5 | length 8.5
  Bottom Layer w0.508: P9.6 63.271,58.496 63.271,56.018 ; 63.271,55.887 65.176,53.982 U6.5
iso_ENA_VL: P10.6 U6.4 | length 5.5
  Bottom Layer w0.508: P10.6 62.001,56.079 63.906,54.174 U6.4
iso_ENA_WH: P9.5 U6.3 | length 8.6
  Bottom Layer w0.508: P9.5 60.731,58.496 60.731,56.018 62.636,54.113 U6.3
iso_ENA_WL: P10.5 U6.2 | length 5.5
  Bottom Layer w0.508: P10.5 59.461,56.21 61.366,54.305 U6.2
iso_PWM_UH: P9.4 U9.7 | length 9.3
  Bottom Layer w0.508: U9.7 54.635,53.144 58.191,56.7 58.191,58.496 P9.4
iso_PWM_UL: P10.4 U9.6 | length 6.2
  Bottom Layer w0.508: U9.6 53.365,53.035 56.921,56.591 P10.4
iso_PWM_VH: P9.3 U9.5 | length 9.3
  Bottom Layer w0.508: U9.5 52.095,53.144 55.651,56.7 55.651,58.496 P9.3
iso_PWM_VL: P10.3 U9.4 | length 6.2
  Bottom Layer w0.508: U9.4 50.825,53.337 54.381,56.893 P10.3
iso_PWM_WH: P9.2 U9.3 | length 9.3
  Bottom Layer w0.508: U9.3 49.555,53.144 53.111,56.7 53.111,58.496 P9.2
iso_PWM_WL: P10.2 U9.2 | length 6.2
  Bottom Layer w0.508: U9.2 48.285,53.162 51.841,56.718 P10.2
NetC2_2: C2.2 L1.2 U2.1 | length 13.1
  Bottom Layer w1.016: C2.2@3.708,56.337 3.708,54.559 U2.1 5.232,49.124 6.088,48.268 L1.2
NetC4_2: C4.2 L2.2 U3.1 | length 3.9
  Bottom Layer w1.27: U3.1 61.62,24.968 62.229,24.359 C4.2
NetC6_2: C6.2 L3.2 U4.1 | length 9.6
  Bottom Layer w1.016: C6.2 5.079,23.736 6.418,25.075 L3.2 6.452,26.678 6.452,28.829 5.482,29.798 U4.1
NetC9_2: C9.2 L4.2 U?.1
NetD1_1: D1.1 R1.1 | length 2.7
  Bottom Layer w1.016: D1.1 10.049,59.299 R1.1
NetD2_1: D2.1 R2.1 | length 2.5
  Bottom Layer w0.508: R2.1 4.108,2.175 D2.1@4.115,2.181
NetD3_1: D3.1 R3.1 | length 2.2
  Bottom Layer w1.016: R3.1 15.545,32.687 D3.1
NetD4_1: D4.1 R4.1 | length 2.2
  Bottom Layer w1.016: D4.1 40.538,43.99 R4.1
NetD?_2: D?.2 L?.1 U?.2
"NetInput L-N1_1": "Input L-N1.1" K1.2 K2.2 | length 39.7
  Bottom Layer w1.016: K1.2@4.51,76.911 K1.2@4.597,76.824 ; K2.2 2.017,65.521 0.914,66.624 0.914,76.403 1.422,76.911 ; K1.2 4.451,76.911 1.422,76.911 ; 12.946,89.357 5.867,89.357 0.887,84.377 0.887,77.446 1.422,76.911
"NetInput L-N1_2": "Input L-N1.2" U11.4 U13.4 | length 11
  Top Layer w1.016: U11.4 16.916,83.642 17.946,84.672 ; 17.946,89.357 17.946,84.672 ; U13.4 18.977,83.642 17.946,84.672
NetK1_1: K1.1 U11.3 | length 12.9
  Bottom Layer w1.016: K1.1@4.597,81.824 9.438,81.824 14.854,76.409 U11.3
NetK2_1: K2.1 U13.3 | length 18
  Bottom Layer w1.016: K2.1@4.597,70.521 7.351,70.521 9.339,72.509 16.324,72.509 19.837,76.022 U13.3
NetP11_3: P11.3 R7.2 R9.2 | length 13.7
  Top Layer w0.508: P11.3 83.21,58.496 83.21,60.579 88.408,65.777
  Bottom Layer w0.508: P11.3 81.94,55.286 R9.2
NetP11_4: P11.4 R8.2 | length 1.8
  Bottom Layer w0.508: P11.4 85.75,58.496
NetR5_1: R5.1 U12.5 | length 1.9
  Bottom Layer w0.508: R5.1 23.223,65.794 U12.5
NetR5_2: R5.2 R11.1 U13.2 | length 5.3
  Top Layer w0.508: R11.1 18.329,68.402 U13.2
  Bottom Layer w0.508: U13.2 22.615,68.402 R5.2
NetR6_1: R6.1 R10.2 U11.2 | length 15.2
  Top Layer w0.508: R6.1 12.868,68.402 U11.2 U11.2@14.854,68.879
  Bottom Layer w0.508: U11.2 16.2,69.748 24.892,69.748 25.416,69.224 R10.2
NetR10_1: R10.1 U12.7 | length 2.4
  Bottom Layer w0.508: R10.1 27.686,67.777 U12.7
PWM_FAN: P12.1 R8.1
pwm_uh: U5.4 U9.10 | length 25.4
  Top Layer w0.508: v3(56.794,44.399) 70.129,44.399 71.78,46.05 71.78,47.32 v3(72.669,48.209)
  Bottom Layer w0.508: U9.10 54.635,45.415 55.651,44.399 v3(56.794,44.399) ; v3(72.669,48.209) U5.4
pwm_ul: U5.2 U9.11 | length 25.6
  Top Layer w0.508: v3(57.429,43.51) 70.51,43.51 v3(72.542,45.542)
  Bottom Layer w0.508: U9.11 53.365,45.542 55.406,43.501 56.417,43.501 56.426,43.51 57.163,43.51 57.172,43.501 v3@57.429,43.501 ; v3(72.542,45.542) 72.669,45.669 U5.2
pwm_vh: U8.4 U9.12 | length 27.1
  Top Layer w0.508: v3(56.794,42.621) 70.383,42.621 v3(72.542,40.462)
  Bottom Layer w0.508: U9.12 52.095,45.669 55.161,42.603 v3@56.794,42.603 ; v3(72.542,40.462) U8.4
pwm_vl: U8.2 U9.13 | length 29.3
  Top Layer w0.508: v3(57.429,41.732) 67.56,41.732 71.37,37.922 v3(72.542,37.922)
  Bottom Layer w0.508: U9.13 50.825,45.862 54.982,41.705 v3@57.429,41.705 ; v3(72.542,37.922) U8.2
pwm_wh: U9.14 U10.4 | length 32.6
  Top Layer w0.508: v3(56.794,40.807) 65.212,40.807 v3(67.97,38.049)
  Bottom Layer w0.508: U9.14 49.555,46.054 54.802,40.807 v3(56.794,40.807) ; v3(67.97,38.049) 73.304,32.715 U10.4
pwm_wl: U9.15 U10.2 | length 34.9
  Top Layer w0.508: v3(57.429,39.909) 63.571,39.909 v3(67.97,35.509)
  Bottom Layer w0.508: U9.15 48.285,46.177 54.554,39.909 v3(57.429,39.909) ; v3(67.97,35.509) 73.304,30.175 U10.2
Relay_1: P13.7 R12.2 U12.2 | length 75.6
  Bottom Layer w0.635: U12.2 27.686,58.75 28.448,57.988 33.122,57.988 33.909,58.776 33.909,62.738 35.079,63.908 36.136,63.908 36.136,64.99 36.754,65.608 87.274,65.608 92.1,60.782 P13.7
Relay_2: P13.6 R13.2 U12.4 | length 74
  Top Layer w0.635: P13.6 P13.6@89.586,59.792
  Bottom Layer w0.635: U12.4 25.146,57.887 25.933,57.099 33.833,57.099 35.458,58.725 R13.2 35.527,59.741 36.64,59.741 41.618,64.719 86.131,64.719 89.56,61.29 P13.6
TACH_FAN: P12.2 R7.1
temp: P5.2 P11.6 | length 20.9
  Bottom Layer w0.508: P11.6@89.179,57.099 89.687,56.591 89.687,44.272 94.767,39.192 P5.2@94.767,38.557
V_DC: P4.2 P11.7 | length 10
  Bottom Layer w0.508: P11.7@91.592,57.226 92.1,56.718 92.1,52.781 94.92,49.962 P4.2@94.92,48.59
pads on no net: P1.0 P2.0 P3.0 P4.0 P5.0 P5.1 P6.0 P7.0 P8.0 P11.5 U1.9 U1.11 U12.1 U12.8

## Polygon pours and split planes (outlines as drawn)
3V3GND on Bottom Layer "Top Layer-No Net" (solid, remove dead copper, shelved, pour order 14): 89.306,34.62 99.72,34.62 99.72,88.087 95.91,88.087 95.91,92.659 83.972,92.659 83.972,75.006 75.336,66.37 30.759,66.37 26.695,70.434 11.98,70.434 9.085,67.539 9.169,67.455 9.169,60.782 1.549,60.782 0.025,59.258 0.152,59.131 0.152,-3.099 3.835,-3.099 3.835,-6.782 21.996,-6.782 21.996,9.093 31.267,18.364 41.554,18.364 41.554,48.844 43.586,50.876 70.129,50.876 71.78,52.527 85.496,52.527 89.306,48.717
ISO_5gnd on Bottom Layer "Top Layer-No Net" (solid, remove dead copper, shelved, pour order 20): 84.012,50.241 73.344,50.241 71.947,48.844 46.38,48.844 44.388,46.852 44.388,21.285 47.309,18.364 75.757,18.364 79.567,14.554 96.593,14.554 99.76,17.721 99.76,31.191 97.39,33.562 89.292,33.562 87.568,35.285 87.568,46.685
3V3GND on Top Layer "Top Layer-No Net" (solid, remove dead copper, shelved, pour order 22): 89.306,34.62 99.72,34.62 99.72,88.087 95.91,88.087 95.91,92.659 83.972,92.659 83.972,75.006 75.336,66.37 30.759,66.37 26.695,70.434 11.98,70.434 9.085,67.539 9.169,67.455 9.169,60.782 1.549,60.782 0.025,59.258 0.152,59.131 0.152,-3.099 3.835,-3.099 3.835,-6.782 21.996,-6.782 21.996,9.093 31.267,18.364 41.554,18.364 41.554,48.844 43.586,50.876 70.129,50.876 71.78,52.527 85.496,52.527 89.306,48.717
ISO_5gnd on Top Layer "Top Layer-No Net" (solid, remove dead copper, shelved, pour order 12): 83.972,50.241 73.304,50.241 71.907,48.844 46.38,48.844 44.348,46.812 44.348,21.285 47.269,18.364 75.717,18.364 79.527,14.554 96.553,14.554 99.72,17.721 99.72,31.191 97.35,33.562 89.252,33.562 87.528,35.285 87.528,46.685

## Other copper
Top Layer:
  rectangle net NetC4_2: 57.556,25.73 62.382,31.064
  rectangle net 24VDC: 0.914,33.985 3.708,38.938
  rectangle net 24VDC: 0.914,43.383 3.708,48.717
  region net 24VDC: 0.914,43.383 0.914,38.938 3.708,38.938 3.708,39.653 4.343,40.288 4.343,41.986 3.708,42.621 3.708,43.383
Bottom Layer:
  region net 24VDC: 2.362,11.303 0.787,12.878 0.787,24.96 3.709,24.96 3.708,17.424 6.274,14.859 18.872,14.859 22.478,18.465 26.289,22.276 34.163,22.276 34.554,21.844 34.554,20.574 34.163,20.183 27.294,20.183 18.414,11.303
  region net 24VDC: 0.787,48.59 0.787,35.001 0.787,18.11 3.708,18.11 3.708,38.532 4.802,39.626 4.802,41.527 3.708,42.621 3.708,48.717 3.327,49.098 1.295,49.098
  region net NetC9_2: 29.591,43.002 29.591,46.279 29.997,46.685 31.394,46.685 31.521,46.812 31.521,48.391 28.274,48.391 25.933,46.05 25.933,43.002
  region net 24VDC: 26.035,39.802 26.035,21.442 27.294,20.183 34.163,20.183 34.554,20.574 34.554,21.885 34.163,22.276 29.973,22.276 29.642,22.607 29.642,42.266 26.035,42.266

## Silkscreen, mask and mechanical layers (free items; w line width, h text height)
Top Overlay:
  text "middlePCB REV3.0 / v.morais@fe.up.pt" at 96.545,-0.432 h0.89 r90
  text "TOP" at 88.131,-5.099 h1.52
Bottom Overlay:
  text "N" at 7.518,89.992 h1.02 r180
  text "L" at 9.042,89.992 h1.02 r180
  text "L" at 3.835,86.436 h1.02 r270
  text "N" at 3.835,84.912 h1.02 r270
  text "L" at 1.168,70.002 h1.02 r270
  text "N" at 1.194,65.176 h1.02 r270
  text "BOT" at 91.973,-5.004 h1.52